# Altium PCB PCB1.PcbDoc
Units mil, origin at the board's own origin, x right, y up, seen from the top; angles counter-clockwise.
Board outline 5400 x 3500 mil, 2 copper layers (Top Layer, Bottom Layer); 91 components, 55 nets, 227 pads, 0 vias.
Unrouted connection lines stored in the file: 163.
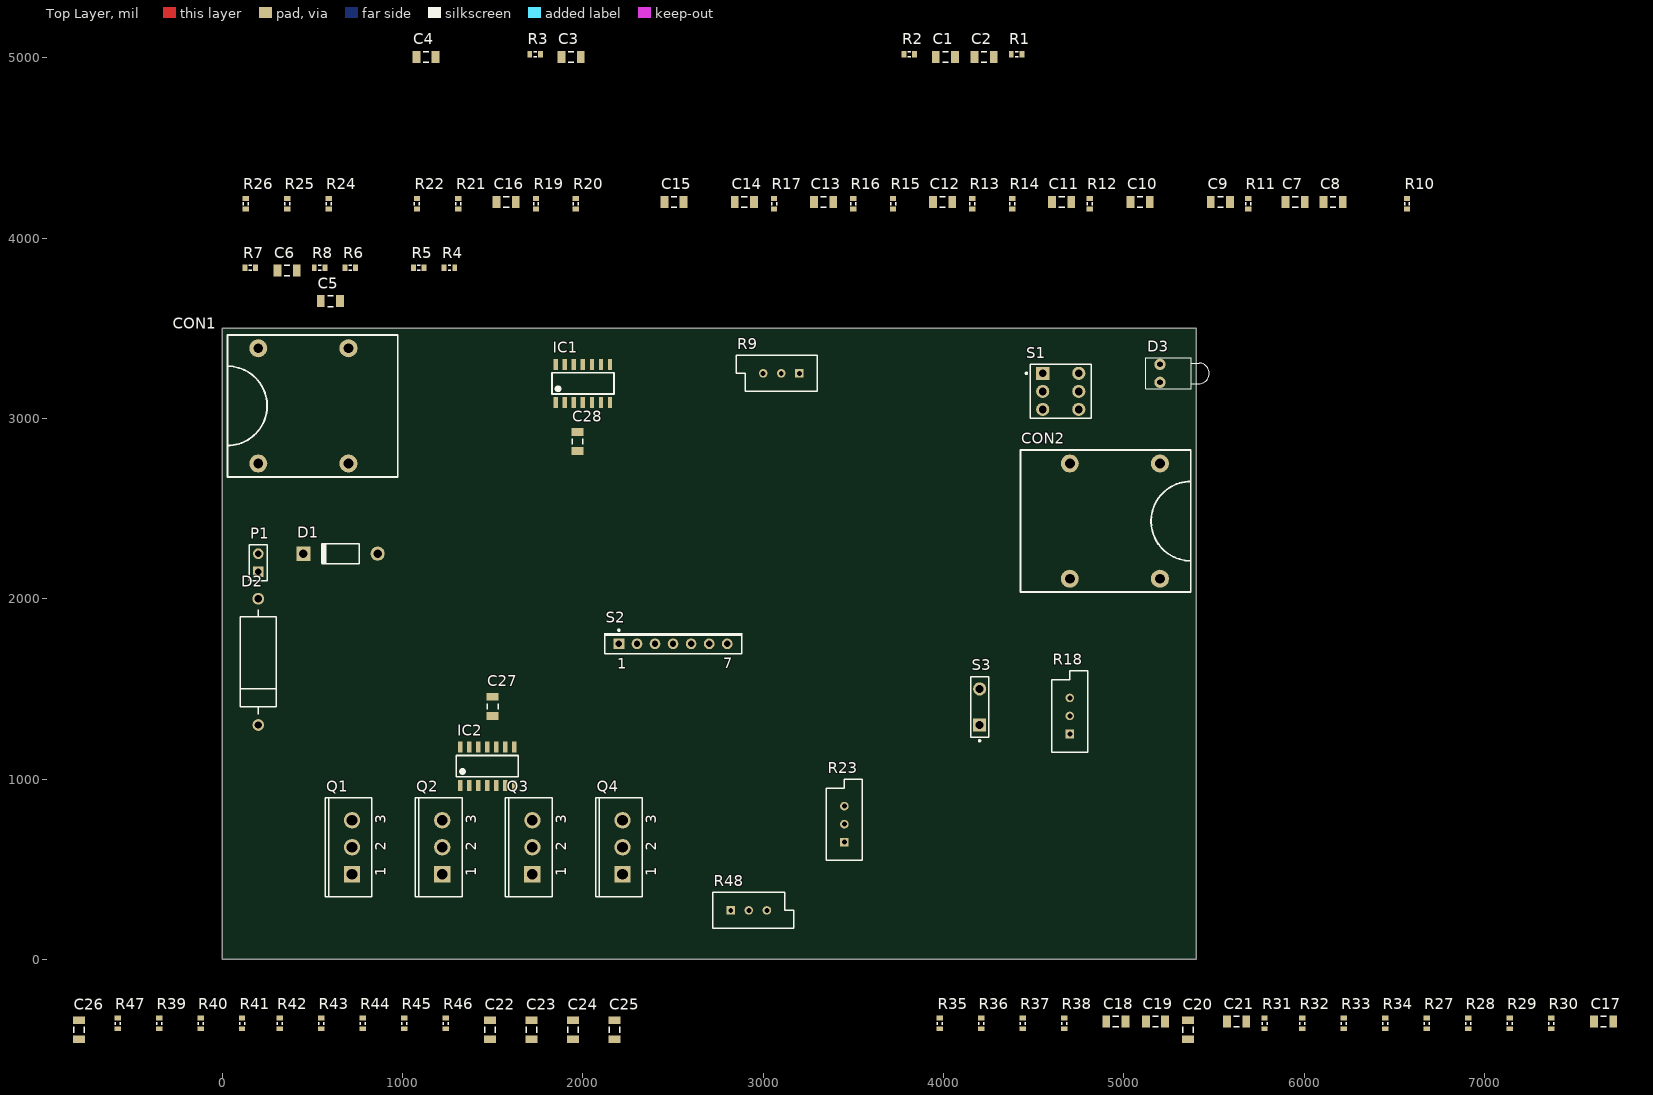
[diagram p0: Top Layer view]
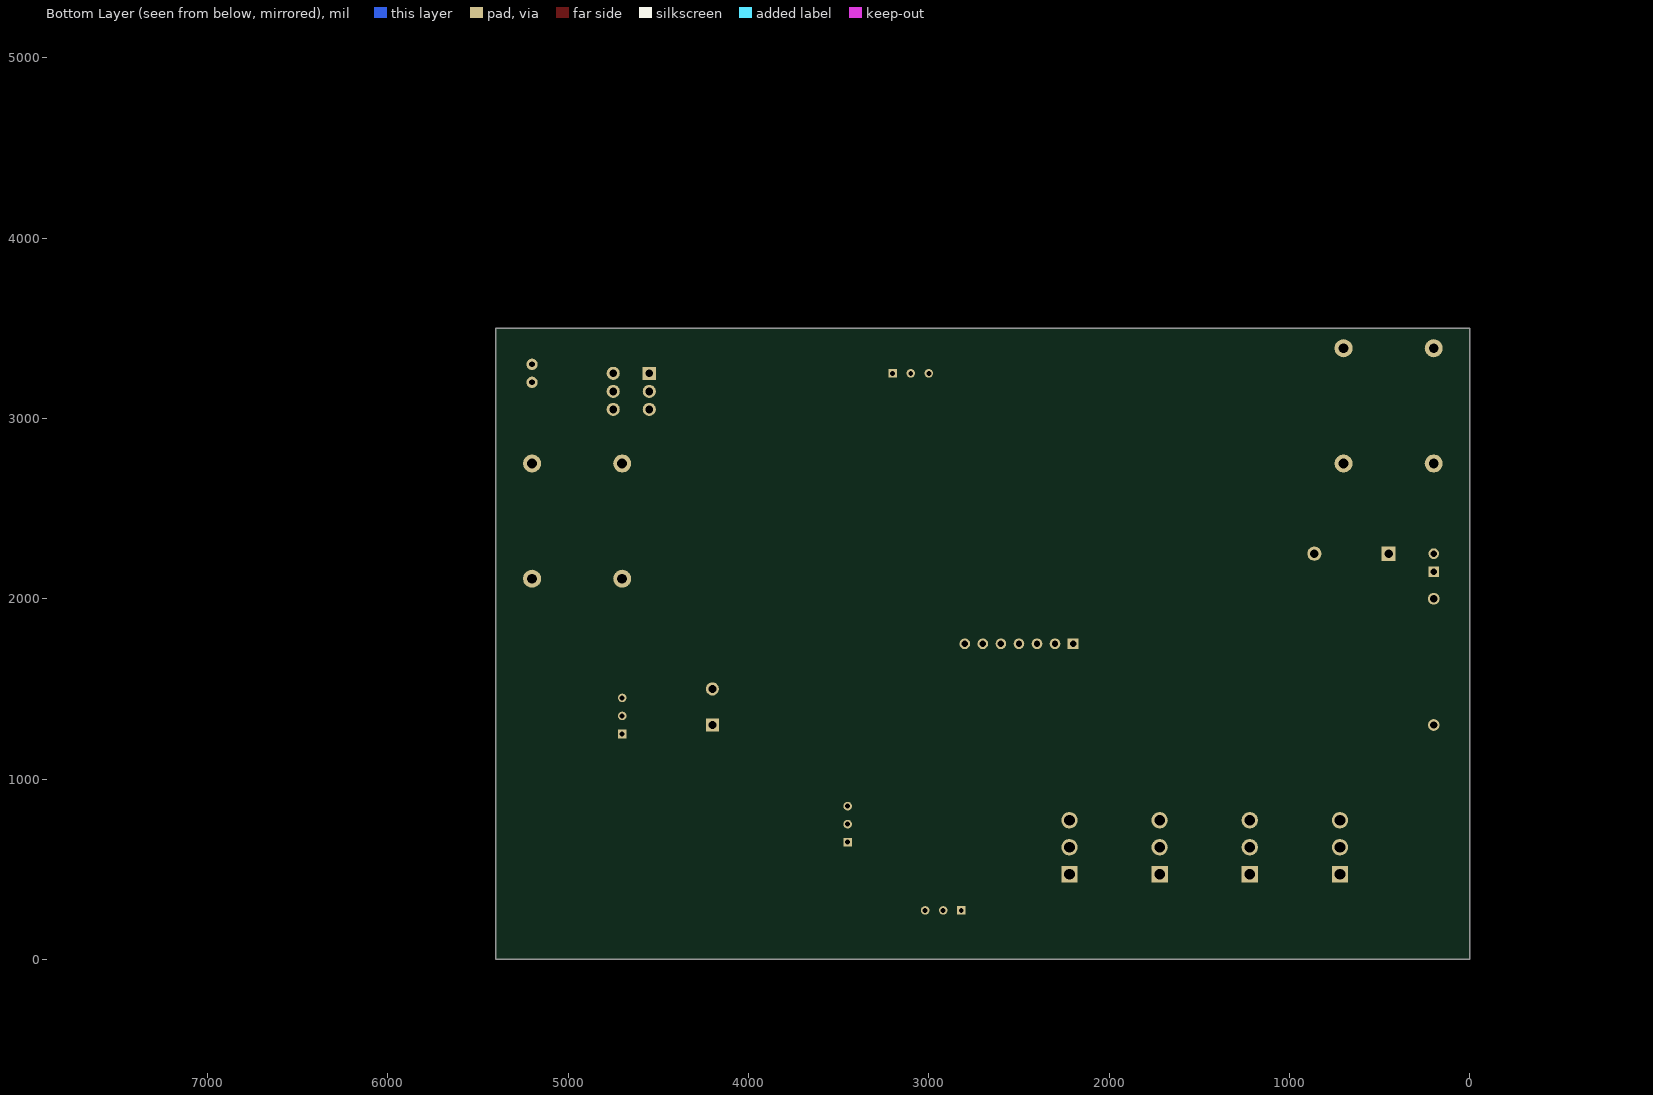
[diagram p1: Bottom Layer view, seen from below]

## Layer stack, top to bottom
Top Solder: solder mask 0.4, Solder Resist, Dk 3.5
Top Layer: signal copper 1.4
Dielectric 1: dielectric 12.6, FR-4, Dk 4.8
Bottom Layer: signal copper 1.4
Bottom Solder: solder mask 0.4, Solder Resist, Dk 3.5

## Board outline
0,0 0,3500 5400,3500 5400,0

## Design rules (kind name [scope] priority, off if disabled: settings)
Clearance [All] p1: gap=10 ignorepadtopadclearanceinfootprint=FALSE except(0: Arc-Hole Track-Hole SMDPad-Hole THPad-Hole Via-Hole Fill-Hole Poly-Hole Region-Hole Text-Hole)
PolygonConnect [All] p1: connectstyle=Relief reliefconductorwidth=10 reliefentries=4 polygonreliefangle="90 Angle" airgapwidth=10
RoutingVias [All] p1: holewidth=28 width=50 viastyle="Through Hole" minholewidth=28 minwidth=50 maxholewidth=28 maxwidth=50
SolderMaskExpansion [All] p1: expansion=4
Width "Schematic Width Constraint" [InNet('VCC')] p1: maxlimit=30 minlimit=15 preferedwidth=20 minimp=50.000000 maximp=50.000000 favimp=50.000000
Width [All] p2: maxlimit=10 minlimit=10 preferedwidth=10
30 further rules are at their usual default settings.

## Classes and differential pairs
component class U_Sheet5: C17 C18 C19 C20 C21 C22 C23 C24 C25 C26 C28 IC2 Q1 Q2 Q3 Q4 R27 R28 R29 R30 R31 R32 R33 R34 R35 R36 R37 R38 R39 R40 R41 R42 R43 R44 R45 R46 R47 R48
component class Sheet3: C1 C2 C3 C4 C5 C6 C7 C8 C9 C10 C11 C12 C13 C14 C15 C16 C27 CON1 CON2 D1 D2 D3 IC1 P1 R1 R2 R3 R4 R5 R6 R7 R8 R9 R10 R11 R12 R13 R14 R15 R16 R17 R18 R19 R20 R21 R22 R23 R24 R25 R26 S1 S2 S3

## Components (designator, comment, footprint, x,y, rotation, side; value= is the part's Value field where it differs from the comment)
C1 "Cap Semi" C1206 4010,5005 r0 top value=100n
C2 "Cap Semi" C1206 4225,5005 r0 top value=220u
C3 "Cap Semi" C1206 1935,5005 r0 top value=10u
C4 "Cap Semi" C1206 1130,5005 r0 top value=10u
C5 "Cap Semi" C1206 600,3650 r0 top value=1u
C6 "Cap Semi" C1206 360,3820 r0 top value=22p
C7 "Cap Semi" C1206 5950,4200 r0 top value=10n
C8 "Cap Semi" C1206 6160,4200 r0 top value=47p
C9 "Cap Semi" C1206 5535,4200 r0 top value=100p
C10 "Cap Semi" C1206 5090,4200 r0 top value=1u
C11 "Cap Semi" C1206 4655,4200 r0 top value=470n
C12 "Cap Semi" C1206 3995,4200 r0 top value=1u
C13 "Cap Semi" C1206 3335,4200 r0 top value=100p
C14 "Cap Semi" C1206 2895,4200 r0 top value=10u
C15 "Cap Semi" C1206 2505,4200 r0 top value=1u
C16 "Cap Semi" C1206 1575,4200 r0 top value=10n
C17 "Cap Semi" C1206 7660,-345 r0 top value=100p
C18 "Cap Semi" C1206 4955,-345 r0 top value=100n
C19 "Cap Semi" C1206 5175,-345 r0 top value=100n
C20 "Cap Semi" C1206 5355,-390 r90 top value=100n
C21 "Cap Semi" C1206 5625,-345 r0 top value=100n
C22 "Cap Semi" C1206 1485,-390 r90 top value=10n
C23 "Cap Semi" C1206 1715,-390 r90 top value=10n
C24 "Cap Semi" C1206 1945,-390 r90 top value=10n
C25 "Cap Semi" C1206 2175,-390 r90 top value=10n
C26 "Cap Semi" C1206 -795,-390 r90 top value=47n
C27 "Cap Semi" C1206 1500,1403.15 r90 top value=1u
C28 "Cap Semi" C1206 1970,2871.85 r90 top value=1u
CON1 "NMJ4HFD2" NMJ4HFD2 450,3069.5 r180 top
CON2 "NMJ4HFD2" NMJ4HFD2 4950,2430.5 r0 top
D1 "D1N4007" DO-41 655.91,2250 r180 top
D2 "DZ 5.6V" DIODE-0.7 200,1650 r270 top
D3 "LED1" LED-1 5200,3250 r0 top
IC1 "TL074A" TL074A 2000,3193.7 r0 top
IC2 "TL074A" TL074A 1470,1071.85 r0 top
P1 "Header 2" HDR1X2 200,2150 r90 top
Q1 "JFET-N" TO-254-AA 720,621.85 r90 top
Q2 "JFET-N" TO-254-AA 1220,621.85 r90 top
Q3 "JFET-N" TO-254-AA 1720,621.85 r90 top
Q4 "JFET-N" TO-254-AA 2220,621.85 r90 top
R1 "Res3" J1-0603 4405,5020 r0 top value=47k
R2 "Res3" J1-0603 3810,5020 r0 top value=10K
R3 "Res3" J1-0603 1735,5020 r0 top value=47k
R4 "Res3" J1-0603 1260,3835 r0 top value=3.3k
R5 "Res3" J1-0603 1090,3835 r0 top value=6.8k
R6 "Res3" J1-0603 710,3835 r0 top value=220k
R7 "Res3" J1-0603 155,3835 r0 top value=1M
R8 "Res3" J1-0603 540,3835 r0 top value=22k
R9 "RPot" VR5 3100,3250 r180 top value=200k
R10 "Res3" J1-0603 6570,4190 r90 top value=22k
R11 "Res3" J1-0603 5690,4190 r90 top value=1K
R12 "Res3" J1-0603 4810,4190 r90 top value=10k
R13 "Res3" J1-0603 4160,4190 r90 top value=10k
R14 "Res3" J1-0603 4380,4190 r90 top value=10k
R15 "Res3" J1-0603 3720,4190 r90 top value=1K
R16 "Res3" J1-0603 3500,4190 r90 top value=10k
R17 "Res3" J1-0603 3060,4190 r90 top value=10k
R18 "RPot" VR5 4700,1350 r90 top value=1M
R19 "Res3" J1-0603 1740,4190 r90 top value=220k
R20 "Res3" J1-0603 1960,4190 r90 top value=10k
R21 "Res3" J1-0603 1310,4190 r90 top value=220k
R22 "Res3" J1-0603 1080,4190 r90 top value=1M
R23 "RPot" VR5 3450,750 r90 top value=200K
R24 "Res3" J1-0603 590,4190 r90 top value=220k
R25 "Res3" J1-0603 360,4190 r90 top value=220k
R26 "Res3" J1-0603 130,4190 r90 top value=10K
R27 "Res3" J1-0603 6680,-355 r90 top value=1K
R28 "Res3" J1-0603 6910,-355 r90 top value=1K
R29 "Res3" J1-0603 7140,-355 r90 top value=1K
R30 "Res3" J1-0603 7370,-355 r90 top value=1K
R31 "Res3" J1-0603 5780,-355 r90 top value=10K
R32 "Res3" J1-0603 5990,-355 r90 top value=10K
R33 "Res3" J1-0603 6220,-355 r90 top value=10K
R34 "Res3" J1-0603 6450,-355 r90 top value=10K
R35 "Res3" J1-0603 3980,-355 r90 top value=10K
R36 "Res3" J1-0603 4210,-355 r90 top value=10K
R37 "Res3" J1-0603 4440,-355 r90 top value=10K
R38 "Res3" J1-0603 4670,-355 r90 top value=10K
R39 "Res3" J1-0603 -350,-355 r90 top value=10K
R40 "Res3" J1-0603 -120,-355 r90 top value=470K
R41 "Res3" J1-0603 110,-355 r90 top value=10K
R42 "Res3" J1-0603 320,-355 r90 top value=470K
R43 "Res3" J1-0603 550,-355 r90 top value=10K
R44 "Res3" J1-0603 780,-355 r90 top value=470K
R45 "Res3" J1-0603 1010,-355 r90 top value=10K
R46 "Res3" J1-0603 1240,-355 r90 top value=470K
R47 "Res3" J1-0603 -580,-355 r90 top value=1K
R48 "RPot" VR5 2920,271.85 r0 top value=1K
S1 "SW-DPDT" DPDT-6 4650,3150 r0 top
S2 "SW-6WAY" SW-7 2500,1750 r0 top
S3 "SW-SPST" SPST-2 4200,1400 r90 top

## Footprints (in the part's own frame and the unit in brackets; to place one, negate y for a bottom-side part, rotate by r counter-clockwise, add the part's x,y. Pads: shape width x height; smd on the part's side, far side on the other; paste and mask are expansions set on the pad)
C1206 [mm] "Chip Capacitor, Body 3.2x1.6mm, IPC High Density"
  rect 1.1x1.7 smd: 1(-1.35,0) 2(1.35,0)
  silkscreen extent -0.4,-0.75 0.4,0.75, body extent -1.7,-0.9 1.7,0.9, height 1.3
DIODE-0.7 [mm] "Diode, Thru-Hole; 2 Leads; 0.7 in Pin Spacing"
  round 1.65 hole 1: 1(-8.89,0) 2(8.89,0)
  silkscreen extent -7.37,-2.54 7.37,2.54
DO-41 [mm] "Diode, Axial; Body 5.2 x 2.7 mm (LxDia. max), Lead Dia. 0.86 mm (max)"
  round 2 hole 1.2: 1(-5.23,0)
  rect 2x2 hole 1.2: 2(5.23,0)
  silkscreen extent -2.65,-1.4 2.75,1.4
DPDT-6 [mm] "Switch; 6 Leads"
  rect 1.85x1.85 hole 1.1: 1(-2.54,2.54)
  round 1.85 hole 1.1: 2(-2.54,0) 3(-2.54,-2.54) 4(2.54,-2.54) 5(2.54,0) 6(2.54,2.54)
  silkscreen extent -4.96,-3.81 4.28,3.81
HDR1X2 [mm] "Connector; Header; 2 Position"
  rect 1.5x1.5 hole 0.9: 1(0,0)
  round 1.5 hole 0.9: 2(2.54,0)
  silkscreen extent -1.27,-1.27 3.81,1.27
J1-0603 [mm] "Chip Resistor, Body 1.6x0.8mm, IPC High Density"
  rect 0.7x0.9 smd: 1(-0.75,0) 2(0.75,0)
  silkscreen extent -0.2,-0.35 0.2,0.35, body extent -0.85,-0.48 0.85,0.48, height 0.9
LED-1 [mm] "LED; 2 Leads"
  round 1.6 hole 0.8: 1(0,1.27) 2(0,-1.27)
  silkscreen extent -2,-2.2 6.95,2.2
NMJ4HFD2 [mil]
  round 100 hole 55.12: S(250,319.5) SN(250,-319.5) T(-250,319.5) TN(-250,-319.5)
  silkscreen extent -524,-394 421,394, body extent -520,-360 732,357, height 637
SPST-2 [mm] "Switch; 2 Leads"
  rect 1.85x1.85 hole 1.1: 1(-2.54,0)
  round 1.85 hole 1.1: 2(2.54,0)
  silkscreen extent -4.89,-1.27 4.28,1.27
SW-7 [mm] "Switch; 7 Leads"
  rect 1.5x1.5 hole 0.9: 1(-7.62,0)
  round 1.5 hole 0.9: 2(-5.08,0) 3(-2.54,0) 4(0,0) 5(2.54,0) 6(5.08,0) 7(7.62,0)
  silkscreen extent -9.75,-1.4 9.75,2.05
TL074A [mm]
  rect 0.6x1.55 smd mask+0.07: 1(-3.81,-2.7) 2(-2.54,-2.7) 3(-1.27,-2.7) 4(0,-2.7) 5(1.27,-2.7) 6(2.54,-2.7) 7(3.81,-2.7) 8(3.81,2.7) 9(2.54,2.7) 10(1.27,2.7) 11(0,2.7) 12(-1.27,2.7) 13(-2.54,2.7) 14(-3.81,2.7)
  silkscreen extent -4.37,-1.5 4.37,1.5, body extent -4.37,-3 4.38,3, height 1.75
TO-254-AA [mm] "TO, Thru-Hole, Vertical, Heatsink Mounted; 3 In-Line Leads; Pitch 3.81 mm"
  rect 2.3x2.3 hole 1.5: 1(-3.81,0)
  round 2.3 hole 1.5: 2(0,0) 3(3.81,0)
  silkscreen extent -6.95,-2.8 6.95,3.8
VR5 [mm] "Thru-Hole; 3 Leads"
  rect 1.2x1.2 hole 0.7: 1(-2.54,0)
  round 1.2 hole 0.7: 2(0,0) 3(2.54,0)
  silkscreen extent -5.08,-2.54 6.35,2.54

## Part data
C1 C2 C3 C4 C5 C6 C7 C8 C9 C10 C11 C12 C13 C14 C15 C16 C17 C18 C19 C20 C21 C22 C23 C24 C25 C26 C27 C28: "Capacitor (Semiconductor SIM Model)", LatestRevisionDate=29-May-2009, LatestRevisionNote="IPC-7351 Footprint Added.", PackageDescription="Chip Capacitor", PackageReference=C1206, Published=8-Jun-2000, Publisher="Altium Limited"
CON1 CON2: "1/4\" jack connector", Supplier Part Number 1=4169244, helpURL=http://www.neutrik.com/en/audio/plugs-and-jacks/m-series/nmj4hfd2, Supplier 1=Farnell, Supplier 2=Mouser, Supplier 3=Newark, Supplier 4="Allied Electronics", Supplier Part Number 2=550-10201, Supplier Part Number 3=14J4924, Supplier Part Number 4=70549221
D1: library part "Diode 1N4007", "1 Amp General Purpose Rectifier", Code_JEDEC=DO-204-AL, ComponentLink1Description="Manufacturer Link", ComponentLink1URL=http://www.fairchildsemi.com/, ComponentLink2Description=Datasheet, ComponentLink2URL=http://www.fairchildsemi.com/ds/1N%2F1N4001.pdf, DatasheetVersion=1998, LatestRevisionDate=17-Jul-2002, LatestRevisionNote="Re-released for DXP Platform.", PackageDescription="Diode, Axial; Body 5.2 x 2.7 mm (LxDia. max), Lead Dia. 0.86 mm (max)", PackageReference=DO-41, PackageVersion=Aug-1999, Published=8-Jun-2000, Publisher="Altium Limited"
D2: library part "D Zener", "Zener Diode", LatestRevisionDate=17-Jul-2002, LatestRevisionNote="Re-released for DXP Platform.", PackageDescription="Diode, Thru-Hole; 2 Leads; 0.7 in Pin Spacing", PackageReference=DIODE-0.7, Published=8-Jun-2000, Publisher="Altium Limited"
D3: "Typical RED GaAs LED", LatestRevisionDate=08-Jul-2005, LatestRevisionNote="Mech Layer 1 removed.", PackageDescription="LED; 2 Leads", PackageReference=LED-1, Published=8-Jun-2000, Publisher="Altium Limited"
IC1 IC2: "TL074A Op-Amp", Supplier Part Number 1=296-14998-1-ND, helpURL=http://www.ti.com/general/docs/lit/getliterature.tsp?genericPartNumber=tl074&fileType=pdf, Supplier 1=Digi-Key, Supplier 2=Farnell, Supplier 3=Mouser, Supplier 4=Newark, Supplier 5=Arrow, Supplier 6=Arrow, Supplier 7=Newark, Supplier Part Number 2=9593349, Supplier Part Number 3=595-TL074ACDR, Supplier Part Number 4=98K1644, Supplier Part Number 5=TL074ACDR, Supplier Part Number 6=TL074ACDR**MULT1, Supplier Part Number 7=85X7487
P1: "Header, 2-Pin", LatestRevisionDate=17-Jul-2002, LatestRevisionNote="Re-released for DXP Platform.", Publisher="Altium Limited"
Q1 Q2 Q3 Q4: "N-Channel JFET", Code_JEDEC=TO-254-AA, LatestRevisionDate=17-Jul-2002, LatestRevisionNote="Re-released for DXP Platform.", PackageReference=TO-254-AA, Published=8-Jun-2000, Publisher="Altium Limited"
R1 R2 R3 R4 R5 R6 R7 R8 R10 R11 R12 R13 R14 R15 R16 R17 R19 R20 R21 R22 R24 R25 R26 R27 R28 R29 R30 R31 R32 R33 R34 R35 R36 R37 R38 R39 R40 R41 R42 R43 R44 R45 R46 R47: "Resistor", LatestRevisionDate=29-May-2009, LatestRevisionNote="IPC-7351 Footprint Added.", PackageDescription="Chip Resistor", PackageReference=J1-0603, Published=8-Jun-2000, Publisher="Altium Limited"
R9 R18 R23 R48: "Potentiometer", LatestRevisionDate=17-Jul-2002, LatestRevisionNote="Re-released for DXP Platform.", PackageDescription="Variable Resistor, Thru-Hole; 3 Leads", PackageReference=VR5, Published=8-Jun-2000, Publisher="Altium Limited", Set Position=0.5, Sim Note="Enter the Resistance value and the set point into parameter fields."
S1: "Double-Pole, Double-Throw Switch", LatestRevisionDate=17-Jul-2002, LatestRevisionNote="Re-released for DXP Platform.", PackageDescription="Switch; 6 Leads", PackageReference=DPDT-6, Published=24-Mar-1999, Publisher="Altium Limited"
S2: "6 Way Switch", LatestRevisionDate=17-Jul-2002, LatestRevisionNote="Re-released for DXP Platform.", PackageDescription="Switch; 7 Leads", PackageReference=SW-7, Published=24-Mar-1999, Publisher="Altium Limited"
S3: "Single-Pole, Single-Throw Switch", LatestRevisionDate=17-Jul-2002, LatestRevisionNote="Re-released for DXP Platform.", PackageDescription="Switch; 2 Leads", PackageReference=SPST-2, Published=24-Mar-1999, Publisher="Altium Limited"

## Nets (pads, with @x,y where several pads share a name; then routed paths per layer and width w, separated by ;. In a path a pad name is that pad's centre, name@x,y a point inside that pad or via, vN(x,y) a via of type N, cw(c..) or ccw(c..) an arc to the next point about the centre after c; other vN are vias at no path point)
B: C17.1 C19.2 IC2.1 R27.1 R32.2 S2.1
BiasA: C3.2 IC1.5 R1.1 R3.2 R8.2
BiasB: C4.2 D2.2 Q1.3 Q2.3 Q3.3 Q4.3 R2.1 R26.2 R39.2 R41.2 R43.2 R45.2
C: C20.2 IC2.7 R28.1 R33.2 S2.2
D: C21.2 IC2.8 R29.1 R34.2 S2.3
E: IC2.14 R30.1 S2.6
GND: C1.1 C2.1 C3.1 C4.1 C6.2 C7.2 C10.2 C13.2 C14.1 C15.1 C27.1 C28.2 CON1.T CON2.T D2.1 IC1.11 IC2.11 P1.1 R3.1 R7.2 R17.2 R24.2 R48.1 S1.1
Mod: C26.1 R22.2 R40.2 R42.2 R44.2 R46.2 R47.2
NetC5_1: C5.1 C6.1 IC1.3 R8.1
NetC5_2: C5.2 R6.1
NetC7_1: C7.1 R4.2
NetC8_2: C8.2 IC1.2 R4.1 R5.1 R12.2
NetC9_1: C9.1 C12.2 IC1.7 R10.1
NetC9_2: C9.2 IC1.6 R9.3 R14.1
NetC10_1: C10.1 R5.2
NetC11_1: C11.1 R14.2
NetC11_2: C11.2 R13.1 R16.1
NetC12_1: C12.1 R15.2
NetC13_1: C13.1 R15.1 R17.1 S1.5
NetC14_2: C14.2 S3.1
NetC15_2: C15.2 IC1.10 R18.1 R19.1 S3.2
NetC16_1: C16.1 IC1.13 R19.2
NetC16_2: C16.2 IC1.14 R20.2 R25.2
NetC17_2: C17.2 IC2.2 R27.2 R31.1
NetC18_1: C18.1 IC2.3 Q1.1 R35.1
NetC19_1: C19.1 IC2.5 Q2.1 R36.1
NetC20_1: C20.1 IC2.10 Q3.1 R37.1
NetC21_1: C21.1 IC2.12 Q4.1 R38.1
NetC22_1: C22.1 Q1.2 R40.1
NetC22_2: C22.2 R35.2 R39.1
NetC23_1: C23.1 Q2.2 R42.1
NetC23_2: C23.2 R36.2 R41.1
NetC24_1: C24.1 Q3.2 R44.1
NetC24_2: C24.2 R37.2 R43.1
NetC25_1: C25.1 Q4.2 R46.1
NetC25_2: C25.2 R38.2 R45.1
NetC26_2: C26.2 R48.2
NetCON1_S: CON1.S R6.2 R7.1 S1.6
NetCON2_S: CON2.S S1.4
NetD1_1: D1.1 P1.2
NetD3_1: D3.1 R11.1
NetD3_2: D3.2 S1.2
NetIC1_8: IC1.8 IC1.9 R23.1
NetIC1_12: IC1.12 R21.2 R24.1 R25.1
NetIC2_6: IC2.6 R28.2 R32.1
NetIC2_9: IC2.9 R29.2 R33.1
NetIC2_13: IC2.13 R30.2 R34.1
NetR9_2: R9.2 R10.2
NetR16_2: R16.2 S2.7
NetR18_3: R18.3 R20.1
NetR22_1: R22.1 R23.3
NetR23_2: R23.2 R26.1
NetR47_1: R47.1 R48.3
VCC: C1.2 C2.2 C27.2 C28.1 D1.2 IC1.4 IC2.4 R1.2 R2.2 R11.2 R21.1
WE: C8.1 C18.2 IC1.1 R12.1 R13.2 R31.2
pads on no net: CON1.SN CON1.TN CON2.SN CON2.TN R9.1 R18.2 S1.3 S2.4 S2.5

## Silkscreen, mask and mechanical layers (free items; w line width, h text height)
Mechanical 1:
  the board outline again, w5

## Text inside footprints (layer, text, board x,y; h text height)
Q1: Top Overlay "1" at 907.99,462.01 h59.06 r90; Top Overlay "2" at 907.99,602.17 h59.06 r90; Top Overlay "3" at 907.99,752.17 h59.06 r90
Q2: Top Overlay "1" at 1407.99,462.01 h59.06 r90; Top Overlay "2" at 1407.99,602.17 h59.06 r90; Top Overlay "3" at 1407.99,752.17 h59.06 r90
Q3: Top Overlay "1" at 1907.99,462.01 h59.06 r90; Top Overlay "2" at 1907.99,602.17 h59.06 r90; Top Overlay "3" at 1907.99,752.17 h59.06 r90
Q4: Top Overlay "1" at 2407.99,462.01 h59.06 r90; Top Overlay "2" at 2407.99,602.17 h59.06 r90; Top Overlay "3" at 2407.99,752.17 h59.06 r90
S2: Top Overlay "7" at 2778.9,1614.37 h59.06; Top Overlay "1" at 2190.91,1611.18 h59.06